# Altium PCB MCH_MAIN.PCBDOC (part 5 of 5)
Units mil, origin at the board's own origin, x right, y up, seen from the top; angles counter-clockwise.
Board outline 7194.88 x 2984.25 mil, 8 copper layers (Top Layer, MidLayer1, MidLayer2, GND, Power, MidLayer3, MidLayer4, Bottom Layer); 584 components, 952 nets, 3896 pads, 365 vias.
Unrouted connection lines stored in the file: 2112.
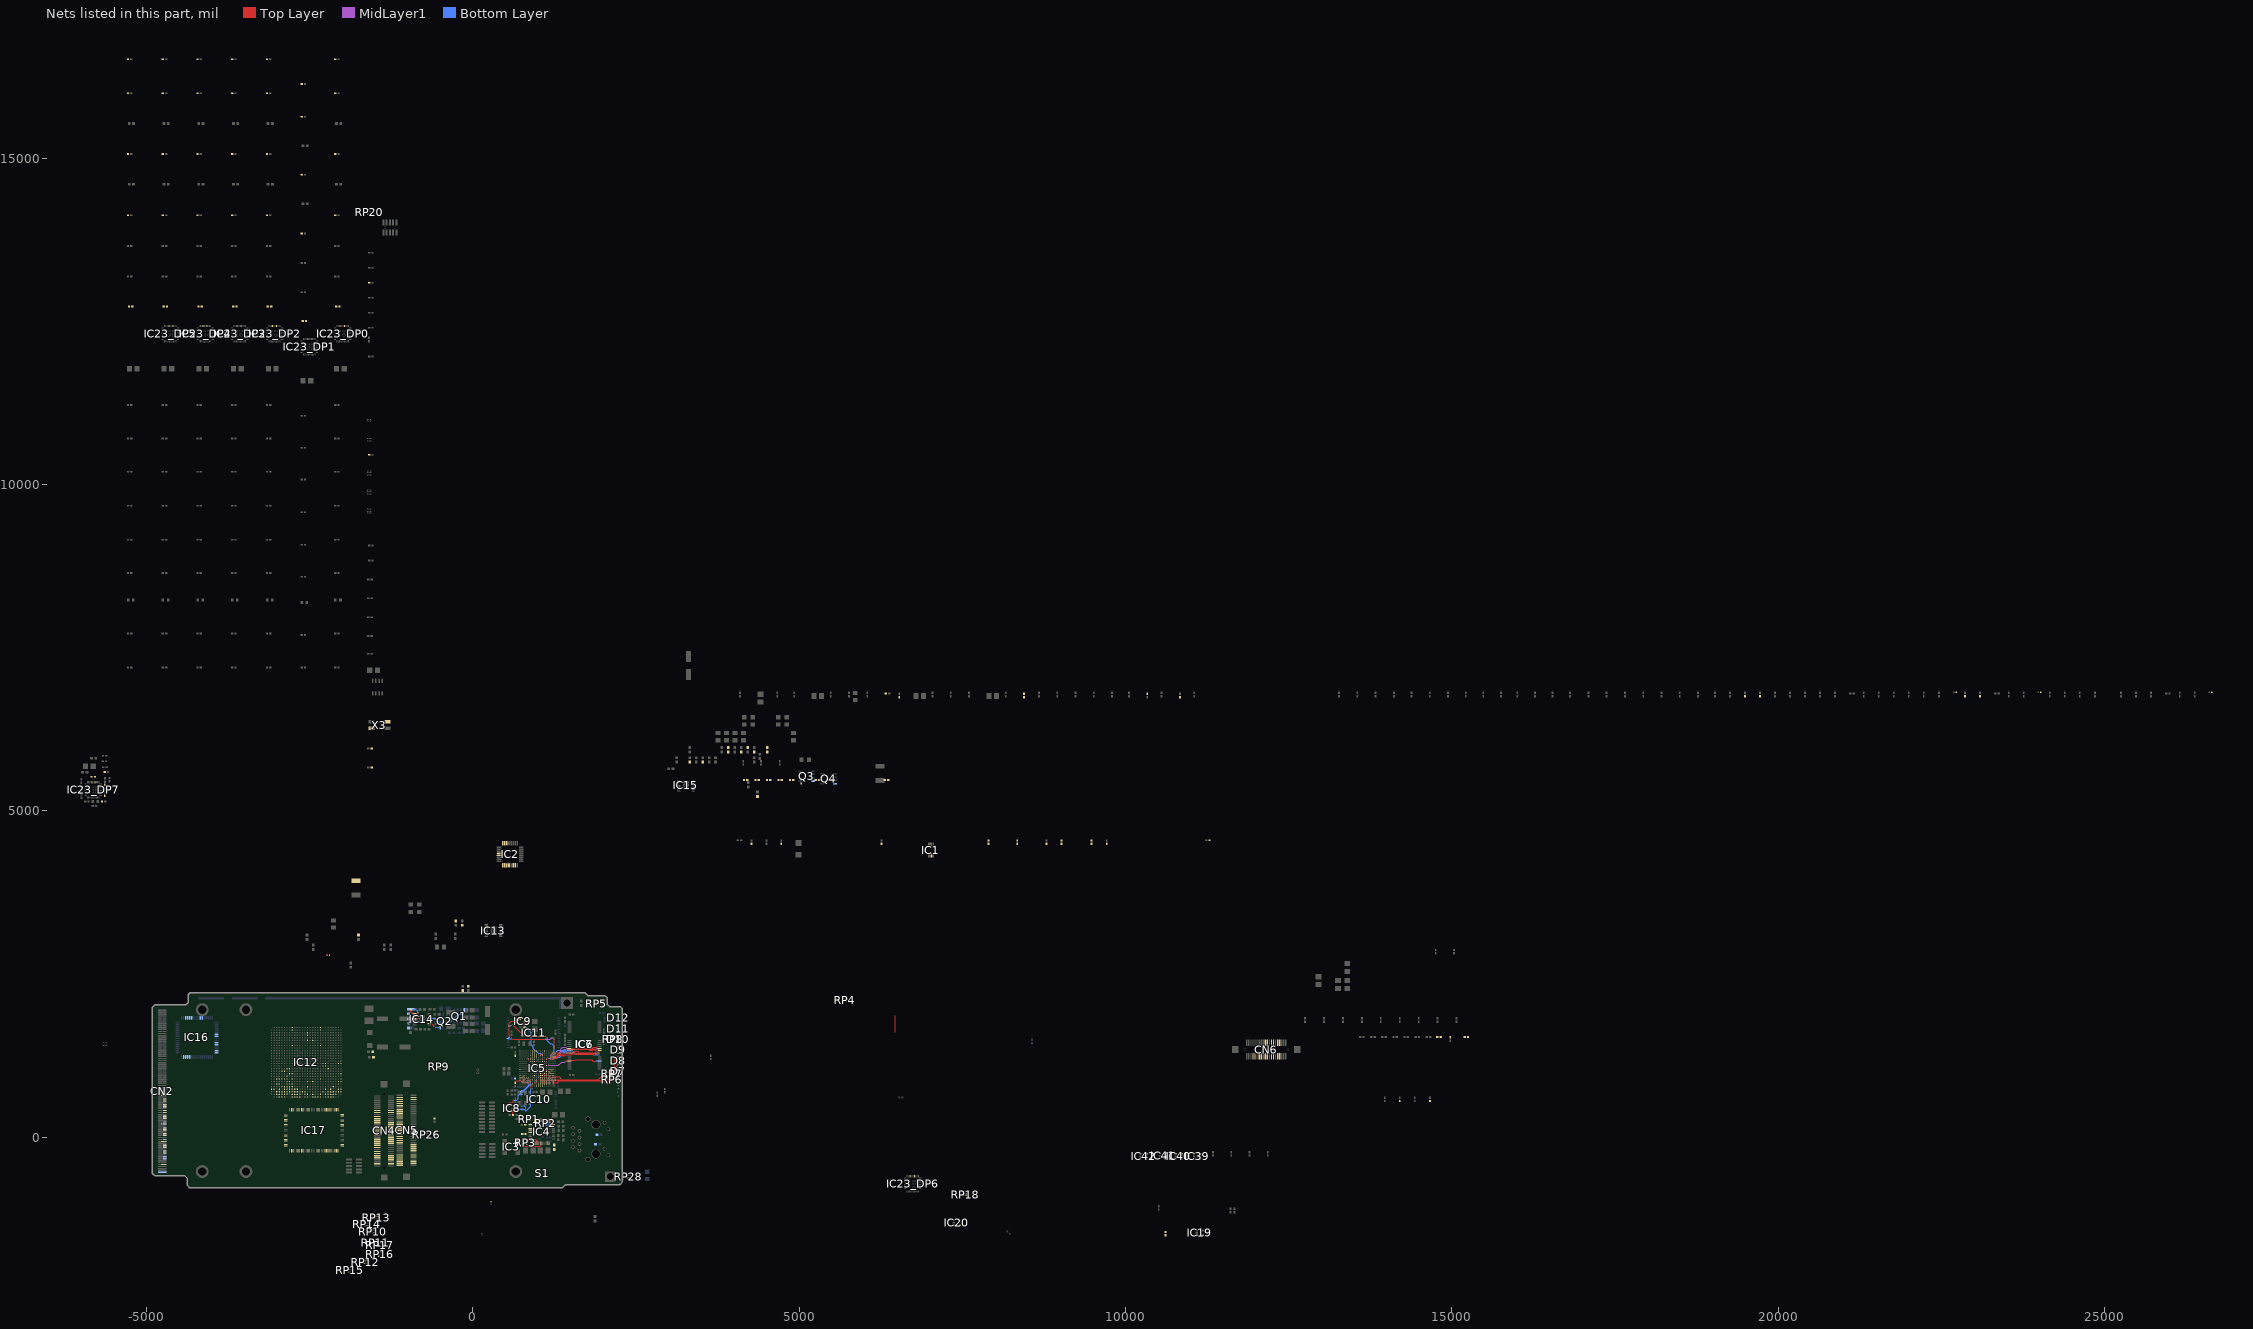
[diagram p8: the nets of this part, all layers, seen from the top]

## Via types
v1: diameter 24, hole 8, Top Layer to Bottom Layer, 183 vias
v2: diameter 18, hole 8, Top Layer to Bottom Layer, 150 vias
v3: diameter 40, hole 24, Top Layer to Bottom Layer, 24 vias
v4: diameter 26, hole 10, Top Layer to Bottom Layer, 8 vias

## Nets (pads, with @x,y where several pads share a name; then routed paths per layer and width w, separated by ;. In a path a pad name is that pad's centre, name@x,y a point inside that pad or via, vN(x,y) a via of type N, cw(c..) or ccw(c..) an arc to the next point about the centre after c; other vN are vias at no path point) (continued)
NetD7_KG: D7.1 RP7.1 | length 89.6
  Top Layer w5: RP7.1@2149.68,940.47 2215.17,940.47 D7.1@2232.22,957.52
NetD7_KR: D7.2 RP7.2 | length 164
  Top Layer w5: RP7.2@2149.68,960.16 2171.15,960.16 2201.1,990.1 2201.1,1053.15 2215.71,1067.76 D7.2@2232.22,1067.76
NetD8_KG: D8.1 RP7.3 | length 182.6
  Top Layer w5: RP7.3@2149.68,979.84 2162.29,979.84 2188.15,1005.7 2188.15,1076.79 D8.1@2232.22,1120.86
NetD8_KR: D8.2 RP7.4 | length 286.1
  Top Layer w5: RP7.4@2149.68,999.53 2167.83,999.53 2178.15,1009.84 2178.15,1193.53 2215.71,1231.09 D8.2@2232.22,1231.09
NetD9_KG: D9.1 RP8.1
NetD9_KR: D9.2 RP8.2
NetD10_KG: D10.1 RP8.3
NetD10_KR: D10.2 RP8.4
NetD11_KG: D11.1 RP28.1
NetD11_KR: D11.2 RP28.2
NetD12_KG: D12.1 RP28.3
NetD12_KR: D12.2 RP28.4
NetD15_1: D15.1 R68.1
NetD16_1: D16.1 R74.1
NetD19_1: D19.1 R78.1
NetIC1_7: IC1.7 R1.2
NetIC2_4: IC2.4 R5.2
NetIC2_5: IC2.5 R6.2
NetIC2_9: IC2.9 R7.2
NetIC2_10: IC2.10 R8.2
NetIC2_11: IC2.11 R9.2
NetIC2_12: IC2.12 R1.1
NetIC2_14: IC2.14 R10.2
NetIC2_15: IC2.15 R11.2
NetIC2_30: IC2.30 R2.2
NetIC2_31: IC2.31 R3.2
NetIC2_32: IC2.32 R4.2
NetIC3_3: IC3.3 IC4.42 IC5.V13 | length 321.1
  Top Layer w8: 765.43,-137.8 1037.4,-137.8 1048.12,-127.08 IC4.42@1048.12,-93.06
NetIC4_11: IC4.11 RP2.8 | length 114.9
  Top Layer w5: v1(1192.91,173.23) 1193.62,173.94 IC4.11@1235.12,173.94
  Bottom Layer w5: RP2.8@1126.97,188.9 1149.68,188.9 1165.35,173.23 v1(1192.91,173.23)
NetIC4_12: IC4.12 R26.2 RP2.7 | length 114.2
  Top Layer w5: v1(1189.96,203.74) 1199.76,193.94 IC4.12@1235.12,193.94
  Bottom Layer w5: RP2.7@1126.97,208.58 1185.12,208.58 v1(1189.96,203.74)
NetIC4_13: IC4.13 R27.2 RP2.6 | length 117.1
  Top Layer w5: IC4.13@1168.12,260.94 1187.88,260.94 1195.87,252.95 v1(1195.87,241.14)
  Bottom Layer w5: RP2.6@1126.97,228.27 1182.99,228.27 v1(1195.87,241.14)
NetIC4_19: IC4.19 IC5.V14 RP1.1
NetIC4_20: IC4.20 IC5.T13 RP1.2 | length 22.3
  Top Layer w8: v2(770.65,928.16) IC5.T13@786.4,943.9
NetIC4_21: IC4.21 IC5.P16 | length 22.3
  Top Layer w8: v2(833.64,833.67) IC5.P16@849.39,849.42
NetIC4_24: IC4.24 IC5.T15 | length 22.3
  Top Layer w8: v2(770.65,865.16) IC5.T15@786.4,880.91
NetIC4_25: IC4.25 IC5.R16 R25.1 | length 22.3
  Top Layer w8: v2(802.15,833.67) IC5.R16@817.89,849.42
NetIC4_28: IC4.28 IC5.R14 RP1.3 | length 22.3
  Top Layer w8: v2(802.15,896.66) IC5.R14@817.89,912.41
NetIC4_29: IC4.29 IC5.T14 RP1.4 | length 22.3
  Top Layer w8: v2(770.65,896.66) IC5.T14@786.4,912.41
NetIC4_31: IC4.31 RP3.5
NetIC4_32: IC4.32 R23.1 RP3.7
NetIC4_36: IC4.36 RP3.8
NetIC4_37: IC4.37 IC5.D11 | length 22.3
  Top Layer w8: IC5.D11@1164.35,1006.9 v2(1180.1,991.15)
NetIC4_38: IC4.38 IC5.U14
NetIC4_39: IC4.39 RP3.6 | length 195
  Top Layer w5: 852.36,-56.1 897.08,-56.1 924.64,-28.54 959.65,-28.54 988.12,-57.02 IC4.39@988.12,-93.06
NetIC4_47: IC4.47 R24.2
NetIC4_48: IC4.48 R24.1
NetIC5_A3: IC5.A3
NetIC5_B2: IC5.B2 IC11.8 | length 961.3
  Top Layer w5: v1(599.3,1509.21) 603.59,1504.92 v1(1107.28,1504.92) ; IC5.B2@1227.34,1290.36 1241.72,1304.74 1241.72,1360.85 1245.96,1365.09 1245.96,1499.9 v1@1249.02,1502.95
  MidLayer1 w5: v1(1107.28,1504.92) 1185.58,1504.92 1209.02,1528.36 1243.3,1528.36 1247.96,1523.7 v1(1247.96,1505.27)
  Bottom Layer w5: IC11.8@541.69,1513.03 595.48,1513.03 v1(599.3,1509.21)
NetIC5_B5: IC5.B5 IC7.39 | length 341.5
  Top Layer w5: IC5.B5@1227.34,1195.87 1236.52,1195.87 1251.31,1210.67 1275.63,1210.67 1310.04,1245.08 1321.85,1245.08 v1(1323.82,1247.05)
  Bottom Layer w5: v1(1323.82,1247.05) 1323.82,1287.2 1358.83,1322.22 1406.88,1322.22 1443.86,1359.2 IC7.39@1477.65,1359.2
NetIC5_B10: IC5.B10
NetIC5_B12: IC5.B12
NetIC5_C3: IC5.C3 IC11.18 | length 1020.3
  Top Layer w5: v1(611.12,1714.93) 621.7,1714.93 787.2,1549.43 1119.86,1549.43 v1@1127.95,1541.34
  Top Layer w8: IC5.C3@1195.85,1258.87 v2(1211.6,1274.61)
  Bottom Layer w5: IC11.18@541.69,1709.88 584.88,1709.88 589.57,1714.57 v1@611.22,1714.57 ; v1@1125.98,1539.37 1125.98,1538.13 1143.03,1521.08 1143.03,1481.71 1190.76,1433.98 1206.44,1433.98 1245.96,1394.45 1245.96,1308.98 v2(1211.6,1274.61)
  other v1: 1127.95,1540.35
NetIC5_C12: IC5.C12
NetIC5_D10: IC5.D10
NetIC5_D12: IC5.D12
NetIC5_E5: IC5.E5 IC6.39 | length 946.3
  Top Layer w5: v1(1812.01,1367.13) 1835.63,1367.13 1847.26,1378.75 1890.95,1378.75 1910.45,1359.25 1943.58,1359.25 IC6.39@1943.64,1359.2
  Top Layer w8: IC5.E5@1132.85,1195.87 v2(1148.6,1211.62)
  MidLayer1 w5: v2(1148.6,1211.62) 1186.95,1211.62 1202.69,1227.36 1268.7,1227.36 1349.59,1308.26 1349.59,1351.99 1376.36,1378.75 1424.42,1378.75 1455.91,1347.26 1645.63,1347.26 1665.5,1367.13 v1(1812.01,1367.13)
NetIC5_E6: IC5.E6
NetIC5_E11: IC5.E11
NetIC5_F1: IC5.F1
NetIC5_F6: IC5.F6
NetIC5_G6: IC5.G6
NetIC5_H3: IC5.H3 IC9.2 R36.1 | length 716.2
  Top Layer w5: R36.1@787.28,1680.24 787.28,1771.54 792.32,1776.57 812.6,1776.57 IC9.2@813.94,1775.24 ; v1(787.31,1709.02) v1@787.76,1709.02
  Top Layer w8: IC5.H3@1038.37,1258.87 v2(1054.11,1274.61)
  Bottom Layer w5: v1(787.31,1709.02) 787.4,1709.12 787.4,1711.61 895.67,1603.35 895.67,1417.69 930.28,1383.08 930.28,1359.6 999.76,1290.11 1038.61,1290.11 v2(1054.11,1274.61)
NetIC5_J17: IC5.J17 R43.1
NetIC5_J18: IC5.J18 R42.1
NetIC5_K16: IC5.K16 R44.1 | length 22.3
  Top Layer w8: v2(959.63,833.67) IC5.K16@975.37,849.42
NetIC5_K18: IC5.K18 R45.1
NetIC5_L13: IC5.L13 R47.1 | length 22.3
  Top Layer w8: v2(928.13,928.16) IC5.L13@943.88,943.9
NetIC5_M15: IC5.M15
NetIC5_M17: IC5.M17 IC8.2 R35.1 | length 812.7
  Top Layer w5: v1(610.24,446.85) 607.28,443.9 607.28,415.35 616.02,406.61 R35.1@616.02,341.1 ; v1@616.02,443.78 618.35,446.1 IC8.2@642.68,446.1 ; v1(900.59,753.94) 897.01,757.52 897.01,802.55 IC5.M17@912.38,817.92
  Bottom Layer w5: v1(610.24,446.85) 697.52,446.85 716.95,427.42 789.1,427.42 805.9,410.62 822.05,410.62 885.64,474.21 885.64,738.99 v1(900.59,753.94)
NetIC5_N15: IC5.N15 IC10.13 | length 270
  Top Layer w8: v2(865.14,865.16) IC5.N15@880.89,880.91
  Bottom Layer w5: IC10.13@744.13,700.08 776.24,700.08 881.64,805.47 881.64,842.77 865.14,859.27 v2(865.14,865.16)
NetIC5_N16: IC5.N16 IC10.14 | length 207.5
  Top Layer w8: v2(865.14,833.67) IC5.N16@880.89,849.42
  Bottom Layer w5: IC10.14@744.13,721.73 783.76,721.73 865.14,803.11 v2(865.14,833.67)
NetIC5_P5: IC5.P5 R32.1 | length 22.3
  Top Layer w8: v2(833.64,1211.62) IC5.P5@849.39,1195.87
NetIC5_P14: IC5.P14 | length 22.3
  Top Layer w8: v2(833.64,896.66) IC5.P14@849.39,912.41
NetIC5_P15: IC5.P15 R46.2 | length 22.3
  Top Layer w8: v2(833.64,865.16) IC5.P15@849.39,880.91
NetIC5_T16: IC5.T16 R23.2 | length 22.3
  Top Layer w8: v2(770.65,833.67) IC5.T16@786.4,849.42
NetIC5_U16: IC5.U16 R30.2 R33.1 RP26.1 | length 121.6
  Top Layer w5: R33.1@650.43,836.69 677.53,863.79 740.53,863.79 IC5.U16@754.9,849.42
NetIC5_V10: IC5.V10
NetIC5_V15: IC5.V15 R28.2 R29.2
NetIC8_4: IC8.4 IC10.11 | length 331
  Top Layer w5: IC8.4@548.19,483.5 549.21,484.53 549.21,514.76 562.99,528.54 605.31,528.54 617.13,540.35 v1(617.13,567.91)
  Bottom Layer w5: v1(617.13,567.91) 670.28,567.91 698.82,596.46 698.82,646.65 708.94,656.77 IC10.11@744.13,656.77
NetIC9_4: IC9.4 IC11.9 | length 447
  Top Layer w5: v1@581.69,1534.45 561.21,1554.93 561.21,1749.22 591.85,1779.86 686.67,1779.86 IC9.4@719.45,1812.64
  Bottom Layer w5: IC11.9@541.69,1532.72 v1(580.94,1532.72)
NetIC10_3: IC10.3 R37.1 R38.1 | length 107
  Bottom Layer w5: IC10.3@744.13,483.54 786.14,483.54 813.98,455.71 v1(813.98,430.12)
NetIC10_12: IC10.12 R46.1
NetIC12_M22: IC12.M22 IC12.P22 R18.1 R19.2
NetIC12_P4: IC12.P4 R20.1
NetIC12_P6: IC12.P6 R41.2
NetIC13_2: IC13.2 R62.2 R63.1
NetIC13_4: IC13.4 R66.2
NetIC13_8: IC13.8 IC13.9 L8.1
NetIC14_1: IC14.1 R59.1 | length 113.6
  Top Layer w10: R59.1@-951.77,1962.6 -951.77,1920.28 -931.62,1900.13 IC14.1@-888.89,1900.13
NetIC14_2: IC14.2 R64.2 | length 182.1
  Top Layer w10: IC14.2@-888.89,1874.54 -863.65,1874.54 v1(-839.57,1898.62)
  Bottom Layer w10: R64.2@-918.31,1962.6 -874.02,1962.6 -851.87,1940.45 ; -851.38,1940.94 -839.57,1929.13 v1(-839.57,1898.62)
NetIC14_4: IC14.4 R65.1 | length 115
  Top Layer w10: IC14.4@-888.89,1823.35 -847.96,1823.35 v4(-844.49,1819.88)
  Bottom Layer w10: R65.1@-912.4,1816.93 -909.45,1819.88 v4(-844.49,1819.88)
NetIC14_10: IC14.10 Q2.4 | length 198.5
  Top Layer w10: IC14.10@-668.42,1746.58 -638.31,1746.58 -599.41,1707.68 -599.41,1694.88 v4(-589.57,1685.04)
  Bottom Layer w10: v4(-589.57,1685.04) Q2.4@-502.95,1685.04
NetIC14_13: IC14.13 Q1.4 | length 715.9
  Top Layer w10: v4(-708.2,1823.35) IC14.13@-668.42,1823.35
  Bottom Layer w10: v4(-708.2,1823.35) -578.28,1823.35 -528.54,1773.62 -336.61,1773.62 -225.39,1884.84 -150.59,1884.84 -134.84,1900.59 Q1.4@-134.84,1930.12
NetIC15_1: IC15.1 R73.1
NetIC15_2: IC15.2 R75.2
NetIC15_4: IC15.4 R76.1
NetIC15_10: IC15.10 Q4.4
NetIC15_13: IC15.13 Q3.4
NetIC23_DP0_17: IC23_DP0.17 R61_DP0.1
NetIC23_DP1_17: IC23_DP1.17 R61_DP1.1
NetIC23_DP2_17: IC23_DP2.17 R61_DP2.1
NetIC23_DP3_17: IC23_DP3.17 R61_DP3.1
NetIC23_DP4_17: IC23_DP4.17 R61_DP4.1
NetIC23_DP5_17: IC23_DP5.17 R61_DP5.1
NetIC23_DP6_17: IC23_DP6.17 R61_DP6.1
NetIC23_DP7_17: IC23_DP7.17 R61_DP7.1
PB16: IC5.B17 R50.1
PB17: IC5.H13 R52.1 | length 22.3
  Top Layer w8: IC5.H13@1038.37,943.9 v2(1054.11,928.16)
PB18: IC5.G18 R54.1
PB19: IC5.H12 R56.1 | length 22.3
  Top Layer w8: IC5.H12@1038.37,975.4 v2(1054.11,959.65)
PB20: IC5.G14 IC12.P24 R22.1 | length 22.3
  Top Layer w8: IC5.G14@1069.86,912.41 v2(1085.61,896.66)
PB21: IC5.G13 IC12.P3 R44.2 | length 22.3
  Top Layer w8: IC5.G13@1069.86,943.9 v2(1085.61,928.16)
PB22: IC5.G17 R20.2
PB23: IC5.G15 IC12.M6 R21.1 | length 22.3
  Top Layer w8: IC5.G15@1069.86,880.91 v2(1085.61,865.16)
PB24: CN5.51 IC5.H16 | length 22.3
  Top Layer w8: IC5.H16@1038.37,849.42 v2(1054.11,833.67)
PB25: CN5.49 IC5.F15 R43.2 | length 22.3
  Top Layer w8: IC5.F15@1101.36,880.91 v2(1117.11,865.16)
PB26: CN5.53 IC5.F14 | length 22.3
  Top Layer w8: IC5.F14@1101.36,912.41 v2(1117.11,896.66)
PB27: CN5.55 IC5.F17
PB28: IC5.G16 IC12.F17 | length 22.3
  Top Layer w8: IC5.G16@1069.86,849.42 v2(1085.61,833.67)
PB29: CN5.70 IC5.F16 | length 22.3
  Top Layer w8: IC5.F16@1101.36,849.42 v2(1117.11,833.67)
PB30: IC5.E15 | length 22.3
  Top Layer w8: IC5.E15@1132.85,880.91 v2(1148.6,865.16)
PB31: IC5.E17 IC11.7
PC0: IC5.E16 RP5.8 | length 22.3
  Top Layer w8: IC5.E16@1132.85,849.42 v2(1148.6,833.67)
PC1: IC5.D17 RP5.7
PC2: IC5.D16 RP5.6 | length 22.3
  Top Layer w8: IC5.D16@1164.35,849.42 v2(1180.1,833.67)
PC3: IC5.C15 RP5.5 | length 22.3
  Top Layer w8: IC5.C15@1195.85,880.91 v2(1211.6,865.16)
PC4: IC5.E14 IC16.3 R48.1 S1.B S1.D | length 22.3
  Top Layer w8: IC5.E14@1132.85,912.41 v2(1148.6,896.66)
PC5: IC5.B16 RP6.8 | length 911
  Top Layer w5: IC5.B16@1227.34,849.42 1243.47,833.29 1274.97,833.29 1275.36,832.91 1291.57,832.91 1323.45,864.79 ; 1323.82,865.16 1323.45,864.79 ; RP6.8@2112.2,851.38 2002.95,851.38 1989.54,864.79 1323.45,864.79
PC6: IC5.D13 RP6.7 | length 63.1
  Top Layer w5: 2076.77,874.02 2080.63,870.16 RP6.7@2110.31,870.16
  Top Layer w8: IC5.D13@1164.35,943.9 v2(1180.1,928.16)
  MidLayer1 w5: v2@1180.12,928.15 v2@1184.15,924.11
PC7: IC5.B15 RP6.6 | length 902.5
  Top Layer w5: IC5.B15@1227.34,880.91 1242.72,865.54 1274.99,865.54 1284.61,875.16 2009.02,875.16 2027.56,893.7 2069.88,893.7 ; 2069.88,893.52 2106.64,893.52 RP6.6@2110.31,889.84
PC8: IC5.C14 RP6.5 | length 56.2
  Top Layer w5: v1(2079.76,917.69) 2087.92,909.53 RP6.5@2110.31,909.53
  Top Layer w8: IC5.C14@1195.85,912.41 v2@1211.6,896.66
  other v2: 1211.61,897.64
PC9: IC5.B14 RP7.8 | length 199
  Top Layer w5: IC5.B14@1227.34,912.41 1233.24,918.31 ; 1233.76,918.8 1242.74,927.78 1277.78,927.78 1279.32,929.32 1327.57,929.32 v1(1349.41,907.48) ; 2052.17,932.09 2060.55,940.47 RP7.8@2110.31,940.47
PC10: IC5.D15 RP7.7 | length 49.1
  Top Layer w5: v1(2083.66,960.63) 2084.13,960.16 RP7.7@2110.31,960.16
  Top Layer w8: IC5.D15@1164.35,880.91 v2(1180.1,865.16)
PC11: IC5.E13 RP7.6 | length 20.9
  Top Layer w8: IC5.E13@1132.85,943.9 1143.57,933.19 1139.75,937.01 1139.75,937.38
  other v2: 1148.62,929.13
PC12: IC5.A15 RP7.5 | length 901.3
  Top Layer w5: IC5.A15@1258.84,880.91 1263.08,885.16 1924.55,885.16 2038.4,999.02 RP7.5@2111.22,999.02
PC13: IC5.F13 | length 22.6
  Top Layer w8: IC5.F13@1101.36,943.9 1117.11,928.16 v2(1116.75,928.16)
PC14: IC5.C13 | length 20.7
  Top Layer w8: IC5.C13@1195.85,943.9 1210.09,929.66 v2(1210.65,929.66)
PC15: IC5.E12 | length 23.1
  Top Layer w8: IC5.E12@1132.85,975.4 1148.6,959.65 1148.44,959.82 v2(1148.44,960.38)
PC16: IC5.D14 | length 22.3
  Top Layer w8: IC5.D14@1164.35,912.41 v2(1180.12,896.65)
PC17: IC5.B13
PC18: IC5.F12 | length 22.3
  Top Layer w8: IC5.F12@1101.36,975.4 v2(1117.11,959.65)
PC19: IC5.A14
PCK0: IC12.A14 R47.2
PE0: IC5.K3
PE1: IC5.K4
PE2: IC5.L6
PE3: IC5.L7
PE4: IC5.L2
PE5: IC5.L5
PE6: IC5.K1
PE7: IC5.L4
PE8: IC5.M7
PE9: IC5.L3
PE10: IC5.L1
PE11: IC5.M4
PE12: IC5.M6
PE13: IC5.M5
PE14: IC5.M2
PE15: IC5.M3
PE16: IC5.N6
PE17: IC5.N5
PE18: IC5.M1
PE19: IC5.N3
PPS_IN: CN5.59 IC12.G25
PPS_OUT: CN5.61 IC12.A19
RAS: IC5.B4 IC6.18 IC7.18 | length 776.3
  Top Layer w5: IC5.B4@1227.34,1227.37 1243.4,1243.43 1278.48,1243.43 1311.6,1276.55 1336.04,1276.55 1349.42,1263.16 1391.17,1263.16 1424.21,1296.21 IC6.18@1480.65,1296.21 ; IC6.18@1481.3,1296.26 1554.13,1296.26 1573.63,1315.76 1605.13,1315.76 1624.63,1296.26 v1(1886.81,1296.26)
  Bottom Layer w5: v1@1878.88,1296.21 IC7.18@1940.65,1296.21
RBCLK_DP0: IC12.J2 R61_DP0.2
RBCLK_DP1: IC12.J1 R61_DP1.2
RBCLK_DP2: IC12.Y2 R61_DP2.2
RBCLK_DP3: IC12.Y1 R61_DP3.2
RBCLK_DP4: IC12.J27 R61_DP4.2
RBCLK_DP5: IC12.J28 R61_DP5.2
RBCLK_DP6: IC12.Y27 R61_DP6.2
RBCLK_DP7: IC12.Y28 R61_DP7.2
RBCLK_UP0: CN4.67 IC12.B15
RBCLK_UP1: CN4.68 IC12.A15
REFCLK1+: CN4.16
REFCLK1-: CN4.18
REFCLK_DP0: IC23_DP0.14 R2.1
REFCLK_DP1: IC23_DP1.14 R3.1
REFCLK_DP2: IC23_DP2.14 R4.1
REFCLK_DP3: IC23_DP3.14 R5.1
REFCLK_DP4: IC23_DP4.14 R6.1
REFCLK_DP5: IC23_DP5.14 R7.1
REFCLK_DP6: IC23_DP6.14 R8.1
REFCLK_DP7: IC23_DP7.14 R9.1
REFCLK_MAIN+: CN4.15 IC1.2 R16.2
REFCLK_MAIN-: CN4.17 IC1.3 R16.1
RS_CTS: CN4.26 IC5.G3 | length 21.5
  Top Layer w8: IC5.G3@1069.86,1258.87 1083.97,1272.98 v2(1085.55,1272.98)
RS_RTS: CN4.28 IC5.G5 | length 22.3
  Top Layer w8: IC5.G5@1069.86,1195.87 v2(1085.61,1211.62)
RS_RXD: CN4.22 IC5.F10 | length 22.3
  Top Layer w8: IC5.F10@1101.36,1038.39 v2(1117.11,1022.65)
RS_TXD: CN4.24 IC5.C10 | length 22.3
  Top Layer w8: IC5.C10@1195.85,1038.39 v2(1211.6,1022.65)
RX+_DP0: C61_DP0.2 CN2.160
RX+_DP1: C61_DP1.2 CN2.154
RX+_DP2: C61_DP2.2 CN2.23
RX+_DP3: C61_DP3.2 CN2.148
RX+_DP4: C61_DP4.2 CN2.32
RX+_DP5: C61_DP5.2 CN2.142
RX+_DP6: C61_DP6.2 CN2.38
RX+_DP7: C61_DP7.2 CN2.136
RX-_DP0: C62_DP0.2 CN2.159
RX-_DP1: C62_DP1.2 CN2.153
RX-_DP2: C62_DP2.2 CN2.24
RX-_DP3: C62_DP3.2 CN2.147
RX-_DP4: C62_DP4.2 CN2.33
RX-_DP5: C62_DP5.2 CN2.141
RX-_DP6: C62_DP6.2 CN2.39
RX-_DP7: C62_DP7.2 CN2.135
RXFUA+: CN2.14 IC20.4 R95.1
RXFUA-: CN2.15 IC20.3 R95.2
SCK: IC16.11 R88.2 RP18.7
SDA10: IC5.E8 IC6.22 IC7.22 | length 866.9
  Top Layer w5: v1(1422.24,1166.34) 1426.13,1170.22 IC6.22@1480.65,1170.22 1502.54,1170.22 1510.55,1178.23 1567.97,1178.23 1579.47,1189.72 1819.74,1189.72 1841.15,1168.31 v1@1882.87,1168.31
  Top Layer w8: IC5.E8@1132.85,1101.39 v2(1148.6,1117.13)
  MidLayer1 w5: v2(1148.6,1117.13) 1164.1,1101.63 1312.26,1101.63 1363.35,1152.72 1408.62,1152.72 v1(1422.24,1166.34)
  Bottom Layer w5: v1(1883.08,1167.72) 1885.59,1170.22 IC7.22@1940.65,1170.22
SDCK: IC5.C5 IC6.38 IC7.38 | length 862.9
  Top Layer w5: v1@1542.32,1327.76 1542.32,1325.79 1563.74,1347.2 1774.48,1347.2 1786.21,1335.47 1835.85,1335.47 1847.58,1347.2 1859.51,1347.2 1879.01,1327.7 IC6.38@1943.64,1327.7
  Top Layer w8: IC5.C5@1195.85,1195.87 v2(1211.6,1211.62)
  Bottom Layer w5: v2(1211.6,1211.62) 1284.46,1211.62 1298.23,1225.39 1333.66,1225.39 1345.47,1237.2 1345.47,1294.72 1362.98,1312.22 1412.4,1312.22 ; 1412.4,1312.01 1422.24,1312.01 1437.94,1327.7 IC7.38@1477.65,1327.7 1479.28,1327.7 1479.33,1327.76 v1(1540.35,1327.76)
SDCKE: IC5.A2 IC6.37 IC7.37 | length 705.8
  Top Layer w5: IC5.A2@1258.84,1290.36 1265.02,1296.55 1367.11,1296.55 v1(1371,1292.66) ; v1@1585.63,1294.29 1595.71,1284.21 1863.45,1284.21 1870.9,1276.76 1906.31,1276.76 1925.76,1296.21 IC6.37@1943.64,1296.21
  Bottom Layer w5: v1(1371,1292.66) 1374.54,1296.21 IC7.37@1477.65,1296.21 v1@1585.63,1296.21
  other v1: 1585.63,1296.26
SDCS: IC5.A4 IC6.19 IC7.19 | length 728.6
  Top Layer w5: IC5.A4@1258.84,1227.37 1264.89,1233.43 1282.62,1233.43 1315.74,1266.55 1331.9,1266.55 1345.28,1253.16 1418.52,1253.16 1430.06,1264.71 IC6.19@1480.65,1264.71 ; IC6.19@1485.24,1264.76 1487.2,1266.73 1513.58,1266.73 1528.55,1281.7 1556.12,1281.7 1567.62,1270.21 1849.87,1270.21 v1(1855.37,1264.71)
  Bottom Layer w5: v1(1855.37,1264.71) IC7.19@1940.65,1264.71 IC7.19@1930.06,1262.74
SDWE: IC5.C4 IC6.16 IC7.16 | length 820
  Top Layer w5: v1(1416.34,1359.25) IC6.16@1480.59,1359.25 ; IC6.16@1481.3,1357.28 1481.3,1359.25 1776.57,1359.25 1790.35,1345.47 1831.71,1345.47 1845.49,1359.25 v1(1882.87,1359.25)
  Top Layer w8: IC5.C4@1195.85,1227.37 v2(1211.6,1243.12)
  Bottom Layer w5: v2(1211.6,1243.12) 1300.7,1332.22 1389.31,1332.22 v1(1416.34,1359.25) ; v1@1874.95,1359.2 IC7.16@1940.65,1359.2
SENSOR_SCL: IC16.27 IC39.1 IC40.1 IC41.1 IC42.1 RP20.8
SENSOR_SDA: IC16.28 IC39.6 IC40.6 IC41.6 IC42.6 RP20.7
SGND_2V5: C180.1 C189.1 IC14.5 R64.1 R65.2 R71.2 R79.1 | length 98.8
  Top Layer w10: v4(-958.66,1746.06) v4@-958.66,1749.02 ; v4@-954.72,1749.02 -932.09,1771.65 -932.09,1788.39 -922.71,1797.76 IC14.5@-888.89,1797.76
SGND_3V3: C206.1 C216.1 IC15.5 R75.1 R76.2 R82.1 R83.2
SMI_RX0: CN6.7 IC12.AC24
SMI_RX1: CN6.13 IC12.W25
SMI_RX2: CN6.19 IC12.Y24
SMI_RX3: CN6.25 IC12.AA22
SMI_RX4: CN6.31 IC12.V25
SMI_RX5: CN6.8 IC12.AF27
SMI_RX6: CN6.14 IC12.AE26
SMI_RX7: CN6.20 IC12.AC25
SMI_TX0: CN6.9 IC12.AA24
SMI_TX1: CN6.15 IC12.V26
SMI_TX2: CN6.21 IC12.AA23
SMI_TX3: CN6.27 IC12.U26
SMI_TX4: CN6.33 IC12.Y23
SMI_TX5: CN6.10 IC12.AE27
SMI_TX6: CN6.16 IC12.AD26
SMI_TX7: CN6.22 IC12.AB24
SPI_CS: IC16.10 RP18.5
TX+_DP0: C108_DP0.2 CN2.163
TX+_DP1: C108_DP1.2 CN2.157
TX+_DP2: C108_DP2.2 CN2.20
TX+_DP3: C108_DP3.2 CN2.151
TX+_DP4: C108_DP4.2 CN2.29
TX+_DP5: C108_DP5.2 CN2.145
TX+_DP6: C108_DP6.2 CN2.35
TX+_DP7: C108_DP7.2 CN2.139
TX-_DP0: C109_DP0.2 CN2.162
TX-_DP1: C109_DP1.2 CN2.156
TX-_DP2: C109_DP2.2 CN2.21
TX-_DP3: C109_DP3.2 CN2.150
TX-_DP4: C109_DP4.2 CN2.30
TX-_DP5: C109_DP5.2 CN2.144
TX-_DP6: C109_DP6.2 CN2.36
TX-_DP7: C109_DP7.2 CN2.138@-4720.08,409.72
TXFUA+: CN2.11 IC19.4
TXFUA-: CN2.12 IC19.3
UP0_RD0: CN5.28 IC12.AB20
UP0_RD1: CN5.30 IC12.AC21
UP0_RD2: CN5.32 IC12.AD21
UP0_RD3: CN5.34 IC12.AD24
UP0_RD4: CN5.36 IC12.AE23
UP0_RD5: CN5.40 IC12.AF23
UP0_RD6: CN5.42 IC12.Y19
UP0_RD7: CN5.44 IC12.AA19
UP0_RD8: CN5.46 IC12.AB22
UP0_RD9: CN5.48 IC12.AB21
UP0_TD0: CN4.27 RP4.8
UP0_TD1: CN4.29 RP4.7
UP0_TD2: CN4.31 RP9.6
UP0_TD3: CN4.33 RP10.5
UP0_TD4: CN4.35 RP11.8
UP0_TD5: CN4.39 RP11.7
UP0_TD6: CN4.41 RP13.6
UP0_TD7: CN4.43 RP13.5
UP0_TD8: CN4.45 RP13.8
UP0_TD9: CN4.47 RP13.7
UP1_RD0: CN5.4 IC12.AD18
UP1_RD1: CN5.6 IC12.AE21
UP1_RD2: CN5.8 IC12.AF21
UP1_RD3: CN5.10 IC12.AC18
UP1_RD4: CN5.12 IC12.AA17
UP1_RD5: CN5.16 IC12.AB17
UP1_RD6: CN5.18 IC12.AE25
UP1_RD7: CN5.20 IC12.AF26
UP1_RD8: CN5.22 IC12.AG25
UP1_RD9: CN5.24 IC12.AH25
UP1_TD0: CN4.32 RP9.1
UP1_TD1: CN4.34 RP9.2
UP1_TD2: CN4.36 RP10.3
UP1_TD3: CN4.38 RP11.4
UP1_TD4: CN4.40 RP12.1
UP1_TD5: CN4.44 RP12.2
UP1_TD6: CN4.46 RP14.3
UP1_TD7: CN4.48 RP14.4
UP1_TD8: CN4.50 RP14.1
UP1_TD9: CN4.52 RP14.2
UP_ENABLE0: CN4.62 RP12.5
UP_ENABLE1: CN5.67 RP15.5
UP_LOOPEN0: CN4.58 RP10.7
UP_LOOPEN1: CN5.68 RP15.7
UP_PRBSEN0: CN4.60 RP10.8
UP_PRBSEN1: CN5.65 RP15.8
UP_SFP_SCL0: CN4.63 RP16.6
UP_SFP_SCL1: CN5.64 RP17.6
UP_SFP_SDA0: CN4.61 RP16.7
UP_SFP_SDA1: CN5.62 RP17.7
UP_SFP_TX_DISABLE0: CN4.59 RP16.8
UP_SFP_TX_DISABLE1: CN5.60 RP17.8
UP_SYNCEN0: CN4.56 RP12.6
UP_SYNCEN1: CN5.66 RP15.6
UTCA_ENABLE#: CN2.41 IC16.44
UTCA_GA0: CN2.5 IC16.47
UTCA_GA1: CN2.17 IC16.46
UTCA_GA2: CN2.26 IC16.45
UTCA_PWRON#: CN2.170 IC16.32 R92.2
VCCA1: C83.1 IC12.Y8 L3.2
VCCA2: C82.1 IC12.J21 L10.2
VCCA3: C96.1 IC12.J8 L6.2
VCCA4: C97.1 IC12.Y21 L7.2
WD_CS: IC5.H14 RP18.4 | length 22.3
  Top Layer w8: IC5.H14@1038.37,912.41 v2(1054.11,896.66)
WD_IN: CN5.3 IC12.A22 IC16.6
WD_IN_CLKB: CN5.5 IC16.4
WD_IN_MAIN: IC12.AB23 IC16.5
WD_IRQ: IC5.K15 IC16.31 | length 22.3
  Top Layer w8: v2(959.63,865.16) IC5.K15@975.37,880.91
WD_MISO: IC5.H18 RP18.3
WD_MOSI: IC5.H15 RP18.1 | length 22.3
  Top Layer w8: IC5.H15@1038.37,880.91 v2(1054.11,865.16)
WD_SCK: IC5.H17 RP18.2
XTAL1: C227.1 IC16.23 X3.1
XTAL2: C228.1 IC16.24 X3.3
ZBT_A0: IC12.AA26 IC17.37
ZBT_A1: IC12.AD28 IC17.36
ZBT_A2: IC12.AC27 IC17.35
ZBT_A3: IC12.AB26 IC17.34
ZBT_A4: IC12.AB27 IC17.33
ZBT_A5: IC12.AC28 IC17.32
ZBT_A6: IC12.A25 IC17.100
ZBT_A7: IC12.C26 IC17.99
ZBT_A8: IC12.B23 IC17.82
ZBT_A9: IC12.A21 IC17.81
ZBT_A10: IC12.H16 IC17.44
ZBT_A11: IC12.AC26 IC17.45
ZBT_A12: IC12.AB25 IC17.46
ZBT_A13: IC12.AE28 IC17.47
ZBT_A14: IC12.AD27 IC17.48
ZBT_A15: IC12.AA25 IC17.49
ZBT_A16: IC12.Y26 IC17.50
ZBT_BW1: IC12.E27 IC17.93
ZBT_BW2: IC12.D26 IC17.94
ZBT_BW3: IC12.B25 IC17.95
ZBT_BW4: IC12.D27 IC17.96
ZBT_CLK: IC17.89 R11.1
ZBT_IO0: IC12.W26 IC17.52
ZBT_IO1: IC12.V27 IC17.53
ZBT_IO2: IC12.U27 IC17.56
ZBT_IO3: IC12.T26 IC17.57
ZBT_IO4: IC12.R26 IC17.58
ZBT_IO5: IC12.P27 IC17.59
ZBT_IO6: IC12.M27 IC17.62
ZBT_IO7: IC12.L28 IC17.63
ZBT_IO8: IC12.K28 IC17.68
ZBT_IO9: IC12.H26 IC17.69
ZBT_IO10: IC12.G27 IC17.72
ZBT_IO11: IC12.F27 IC17.73
ZBT_IO12: IC12.E26 IC17.74
ZBT_IO13: IC12.F26 IC17.75
ZBT_IO14: IC12.D24 IC17.78
ZBT_IO15: IC12.B22 IC17.79
ZBT_IO16: IC12.B26 IC17.2
ZBT_IO17: IC12.C27 IC17.3
ZBT_IO18: IC12.D28 IC17.6
ZBT_IO19: IC12.E28 IC17.7
ZBT_IO20: IC12.F28 IC17.8
ZBT_IO21: IC12.G28 IC17.9
ZBT_IO22: IC12.G16 IC17.12
ZBT_IO23: IC12.G15 IC17.13
ZBT_IO24: IC12.M28 IC17.18
ZBT_IO25: IC12.P28 IC17.19
ZBT_IO26: IC12.R28 IC17.22
ZBT_IO27: IC12.R27 IC17.23
ZBT_IO28: IC12.V28 IC17.24 | length 0.9
  Top Layer w5: IC12.V28@-2688.27,617.83 IC12.V28@-2688.27,618.78
ZBT_IO29: IC12.U28 IC17.25 | length 262.3
  Top Layer w5: IC12.U28@-2648.9,618.78 -2639.65,609.53 ; 6475.51,1613.23 6475.51,1862.48
ZBT_IO30: IC12.W28 IC17.28
ZBT_IO31: IC12.W27 IC17.29
ZBT_IOP1: IC12.Y25 IC17.51
ZBT_IOP2: IC12.E25 IC17.80
ZBT_IOP3: IC12.A26 IC17.1
ZBT_IOP4: IC12.H15 IC17.30
pads on no net: CN1. CN1.0 CN1.17 CN1.19 CN2.2mate CN2.3mate CN2.6 CN2.8 CN2.44 CN2.45 CN2.47 CN2.48 CN2.50 CN2.51 CN2.53 CN2.54 CN2.59 CN2.60 CN2.62 CN2.63 CN2.65 CN2.66 CN2.68 CN2.69 CN2.74 CN2.75 CN2.77 CN2.78 CN2.80 CN2.81 CN2.87 CN2.88 CN2.90 CN2.91 CN2.93 CN2.94 CN2.96 CN2.97 CN2.132 CN2.133 CN2.138@-4720.08,409.72 CN2.165 CN2.166 CN2.167 CN2.168 CN2.169 CN2.lmate CN3.7 CN4. CN5. CN6. CN6.26 CN6.28 CN6.32 CN6.34 CN7. CN8. CN9. CN9.3 IC1.1 IC1.4 IC1.6 IC2.16 IC2.20 IC2.21 IC2.25 IC2.26 IC2.27 IC4.14 IC4.16 IC4.17 IC4.18 IC4.22 IC4.26 IC4.27 IC4.34 IC4.35 IC4.43 IC4.45 IC5.A12 IC5.A13 IC5.A18 IC5.B11 IC5.B18 IC5.C11 IC5.C18 IC5.D3 IC5.D18 IC5.E18 IC5.F11 IC5.F18 IC5.G2 IC5.G7 IC5.G9 IC5.H2 IC5.H4 IC5.H5 IC5.H6 IC5.J12 IC5.J13 IC5.J14 IC5.J15 IC5.K13 IC5.K17 IC5.L14 IC5.L15 IC5.L16 IC5.L17 IC5.L18 IC5.M14 IC5.M16 IC5.M18 IC5.N1 IC5.N2 IC5.N4 IC5.P2 IC5.P4 IC5.R2 IC5.R15 IC5.U13 IC6.40 IC7.40 IC10.1 IC10.4 IC10.5 IC10.8 IC10.9 IC10.10 IC10.15 IC10.17 IC10.18 IC10.19 IC10.20 IC10.21 IC10.22 IC10.23 IC10.24 IC10.25 IC10.26 IC10.27 IC10.28 IC11.1 IC11.2 IC11.3 IC11.4 IC11.5 IC11.6 IC11.10 IC11.11 IC11.14 IC11.15 IC11.20 IC11.21 IC11.22 IC11.23 IC11.24 IC11.25 IC11.26 IC11.27 IC11.28 IC11.33 IC11.34 IC11.35 IC11.39 IC11.40 IC11.45 IC11.46 IC11.47 IC11.48 IC12.A3 IC12.A4 IC12.A6 IC12.A7 IC12.A8 IC12.AA21 IC12.AC22 IC12.AD22 IC12.AG14 IC12.AG26 IC12.AH14 IC12.AH26 IC12.B3 IC12.B4 IC12.B6 IC12.B7 IC12.B8 IC12.C3 IC12.C4 IC12.C5 IC12.C6 IC12.C7 IC12.C8 IC12.C9 IC12.C10 IC12.C11 IC12.D4 IC12.D5 IC12.D6 IC12.D7 IC12.D8 IC12.D9 IC12.D10 IC12.D11 IC12.E4 IC12.E5 IC12.E7 IC12.E8 IC12.E10 IC12.E11 IC12.E12 IC12.E15 IC12.F7 IC12.F8 IC12.F10 IC12.F11 IC12.F12 IC12.F15 IC12.G7 IC12.G8 IC12.G9 IC12.G10 IC12.G11 IC12.G12 IC12.G17 IC12.H8 IC12.H10 IC12.H12 IC12.H17 IC12.J10 IC12.J14 IC12.J16 IC12.M21 IC12.N21 IC12.P21 IC12.R21 IC12.R22 IC12.R23 IC12.R24 IC12.R25 IC12.T21 IC12.T22 IC12.T25 IC12.U21 IC12.U22 IC12.U24 IC12.U25 IC12.V22 IC12.V24 IC12.W22 IC12.Y22 IC13.3 IC16.1 IC16.2 IC16.33 IC16.34 IC16.43 IC17.38 IC17.39 IC17.42 IC17.43 IC17.83 IC17.84 IC23_DP0.18 IC23_DP1.18 IC23_DP2.18 IC23_DP3.18 IC23_DP4.18 IC23_DP5.18 IC23_DP6.18 IC23_DP7.18 RP2.4 RP2.5 RP4.3 RP4.4 RP4.5 RP4.6 RP9.4 RP9.5 RP11.3 RP11.6 RP16.4 RP16.5 RP17.4 RP17.5 S1.
copper on no net: | length 0

## Polygon pours and split planes (outlines as drawn)
SGND_2V5 on Bottom Layer "SGND_2V5" (solid): -1078.74,2019.42 -1078.74,1631.63 -1047.24,1600.13 -763.78,1600.13 -741.14,1622.77 -741.14,1996.78 -763.78,2019.42
GND on GND (split plane): 1752.14,2155.61 1755.19,2153.11 1758.66,2151.25 1762.43,2150.11 1766.35,2149.72 2017.87,2149.72 2043.5,2124.09 2043.5,2033.99 2043.89,2030.07 2045.03,2026.3 2046.89,2022.83 2049.39,2019.78 2080.88,1988.29 2083.93,1985.79 2087.4,1983.93 2091.17,1982.79 2095.09,1982.4 2252.12,1982.4 2267.91,1966.61 2267.91,-682.09 2244.25,-705.75 1419.9,-705.75 1415.98,-706.14 1412.21,-707.28 1408.73,-709.14 1405.69,-711.64 1368.26,-749.06 -4331.62,-749.06 -4357.25,-723.43 -4357.25,-625.46 -4357.64,-621.54 -4358.78,-617.77 -4360.64,-614.29 -4363.14,-611.25 -4396.6,-577.78 -4399.65,-575.28 -4403.12,-573.43 -4406.89,-572.28 -4410.81,-571.9 -4861.15,-571.9 -4880.85,-552.19 -4886.78,-546.27 -4886.78,1984.33 -4861.15,2009.96 -4395.06,2009.96 -4391.14,2010.34 -4387.37,2011.49 -4383.9,2013.35 -4380.85,2015.84 -4345.42,2051.28 -4342.92,2054.32 -4341.06,2057.8 -4339.92,2061.57 -4339.53,2065.49 -4339.53,2175.27 -4319.81,2195 1712.75,2195
no net on Power (split plane): 1752.14,2155.61 1755.19,2153.11 1758.66,2151.25 1762.43,2150.11 1766.35,2149.72 2017.87,2149.72 2043.5,2124.09 2043.5,2033.99 2043.89,2030.07 2045.03,2026.3 2046.89,2022.83 2049.39,2019.78 2080.88,1988.29 2083.93,1985.79 2087.4,1983.93 2091.17,1982.79 2095.09,1982.4 2252.12,1982.4 2267.91,1966.61 2267.91,-682.09 2244.25,-705.75 1419.9,-705.75 1415.98,-706.14 1412.21,-707.28 1408.73,-709.14 1405.69,-711.64 1368.26,-749.06 -4331.62,-749.06 -4357.25,-723.43 -4357.25,-625.46 -4357.64,-621.54 -4358.78,-617.77 -4360.64,-614.29 -4363.14,-611.25 -4396.6,-577.78 -4399.65,-575.28 -4403.12,-573.43 -4406.89,-572.28 -4410.81,-571.9 -4861.15,-571.9 -4880.85,-552.19 -4886.78,-546.27 -4886.78,1984.33 -4861.15,2009.96 -4395.06,2009.96 -4391.14,2010.34 -4387.37,2011.49 -4383.9,2013.35 -4380.85,2015.84 -4345.42,2051.28 -4342.92,2054.32 -4341.06,2057.8 -4339.92,2061.57 -4339.53,2065.49 -4339.53,2175.27 -4319.81,2195 1712.75,2195

## Keep-outs
Keep-Out Layer:
  rectangle: -4323.23,2095.47 1318.9,2162.01
  rectangle: -4323.23,-731.69 1367.72,-663.58

## Other copper
Top Layer:
  region: 923.23,1071.85 923.23,1083.66 926.18,1086.61
  region: 1530.13,1971 2012.42,1971 2012.42,2128.48 1713.2,2128.48 1713.2,2156.04 1530.13,2156.04
  region: 917.93,-658.92 917.93,-725.85 1358.87,-725.85 1358.87,-662.86 1683.68,-662.86 1683.68,-682.54 2248.64,-682.54 2248.64,-509.32 1181.71,-509.32 1181.71,-658.92
  region: 926.77,-664.76 926.77,-731.69 1367.72,-731.69 1367.72,-668.7 1692.52,-668.7 1692.52,-688.39 2257.48,-688.39 2257.48,-515.16 1190.55,-515.16 1190.55,-664.76
Bottom Layer:
  region: 1530.13,1971 2012.42,1971 2012.42,2128.48 1713.2,2128.48 1713.2,2156.04 1530.13,2156.04
  region: 917.93,-658.92 917.93,-725.85 1358.87,-725.85 1358.87,-662.86 1683.68,-662.86 1683.68,-682.54 2248.64,-682.54 2248.64,-509.32 1181.71,-509.32 1181.71,-658.92
  region: 926.77,-664.76 926.77,-731.69 1367.72,-731.69 1367.72,-668.7 1692.52,-668.7 1692.52,-688.39 2257.48,-688.39 2257.48,-515.16 1190.55,-515.16 1190.55,-664.76

## Silkscreen, mask and mechanical layers (free items; w line width, h text height)
Mechanical 1:
  lines w0.39: -4487.76,-564.37 -4362.6,-564.37 cw(c-4362.6,-603.74) -4323.23,-603.74 -4323.23,-713.98 ; -4476.77,1994.69 -4363.23,1994.69 ; -4364.57,1994.69 ccw(c-4363.58,2035.04) -4323.23,2034.06 -4323.23,2142.32 cw(c-4303.54,2142.32) -4303.54,2162.01 1722.05,2162.01 1722.05,2126.57 1722.05,2122.64 2021.26,2122.64 2021.26,1957.28 2257.48,1957.28 2257.48,-688.39 1692.52,-688.39 1692.52,-668.7 1367.72,-668.7 1367.72,-731.69 -4305.51,-731.69 ; -4323.23,-712.01 ccw(c-4303.54,-712.01) -4303.54,-731.69 ; 1662.99,-525 1662.99,-517.13 1662.99,-513.19 1190.55,-513.19 1190.55,-580.12 1662.99,-580.12 1662.99,-523.03
Mechanical 15:
  circle w0.39: c-4587.01,-525 r8.12
  circle w0.39: c-4587.01,1955.31 r8.35
  lines w0.39: -4602.76,-525 -4569.29,-525 ; -4602.76,1955.31 -4569.29,1955.31 ; -4587.01,-540.75 -4587.01,-509.25 ; -4587.01,1939.57 -4587.01,1971.06 ; 1043.88,-549.88 cw(c1031.98,-549.71) 1043.88,-549.71 ; 1114.7,-549.67 cw(c1098.98,-549.67) 1114.7,-549.45 ; 1389.37,2057.68 1722.05,2057.68 1822.44,2057.68 ; 1661.02,1986.81 1661.02,2037.99 1661.02,2061.61 ; 1661.02,2059.65 1661.02,2079.33 ; 1661.02,2071.46 1661.02,2118.7 ; 1779.13,1986.81 1779.13,2037.99 1779.13,2061.61 ; 1779.13,2030.12 1779.13,2057.68 1779.13,2075.39 ; 1779.13,2059.65 1779.13,2079.33 ; 1779.13,2071.46 1779.13,2118.7 ; 1818.5,2057.68 2021.26,2057.68 ; 1995.67,1986.81 1995.67,2037.99 1995.67,2061.61 ; 1995.67,2030.12 1995.67,2057.68 1995.67,2075.39 ; 1995.67,2059.65 1995.67,2079.33 ; 1995.67,2071.46 1995.67,2118.7 ; 2021.26,2057.68 2021.26,2118.7 1970.08,2118.7 1970.08,1986.81 2021.26,1986.81 2021.26,2057.68 ; 926.77,-664.76 1190.55,-664.76 1190.55,-438.39 1188.58,-438.39 926.77,-438.39 926.77,-664.76 ; 1542.91,1965.16 1542.91,2150.2 1722.05,2150.2 1722.05,2122.64 2021.26,2122.64 2021.26,1965.16 1542.91,1965.16 ; 1635.43,1986.81 1635.43,2118.7 1686.61,2118.7 1686.61,2057.68 1686.61,1986.81 1635.43,1986.81 ; 1753.54,1986.81 1804.72,1986.81 1804.72,2057.68 1804.72,2118.7 1753.54,2118.7 1753.54,1986.81
  text "Edge connector markings" at -4461.02,-548.62 h27.56
  text "MCH PCB1" at -1090.55,-1676.18 h393.7

## Text inside footprints (layer, text, board x,y; h text height)
C213: Top Overlay "+" at 198.99,1467.85 h59.06 r270
C214: Top Overlay "+" at -1531.15,1410.01 h59.06 r180
C215: Top Overlay "+" at -1526.57,1833.66 h59.06 r180
Q1: Bottom Overlay "3" at -131.72,1763.43 h59.05 r90; Bottom Overlay "1" at -230.85,1763.43 h59.05 r90
Q2: Bottom Overlay "3" at -503.28,1869.57 h59.05 r270; Bottom Overlay "1" at -404.15,1869.57 h59.05 r270
Q3: Bottom Overlay "3" at 5026.89,5456.57 h59.05; Bottom Overlay "1" at 5026.89,5555.7 h59.05
Q4: Bottom Overlay "3" at 5223.98,5584.69 h59.05; Bottom Overlay "1" at 5336.18,5689.02 h59.05